# Altium PCB pico_host_board_v01_top.PcbDoc
Units mil, origin at the board's own origin, x right, y up, seen from the top; angles counter-clockwise.
Board outline 6000 x 4000 mil, 2 copper layers (Top Layer, Bottom Layer); 71 components, 75 nets, 449 pads, 3 vias.
Unrouted connection lines stored in the file: 320.
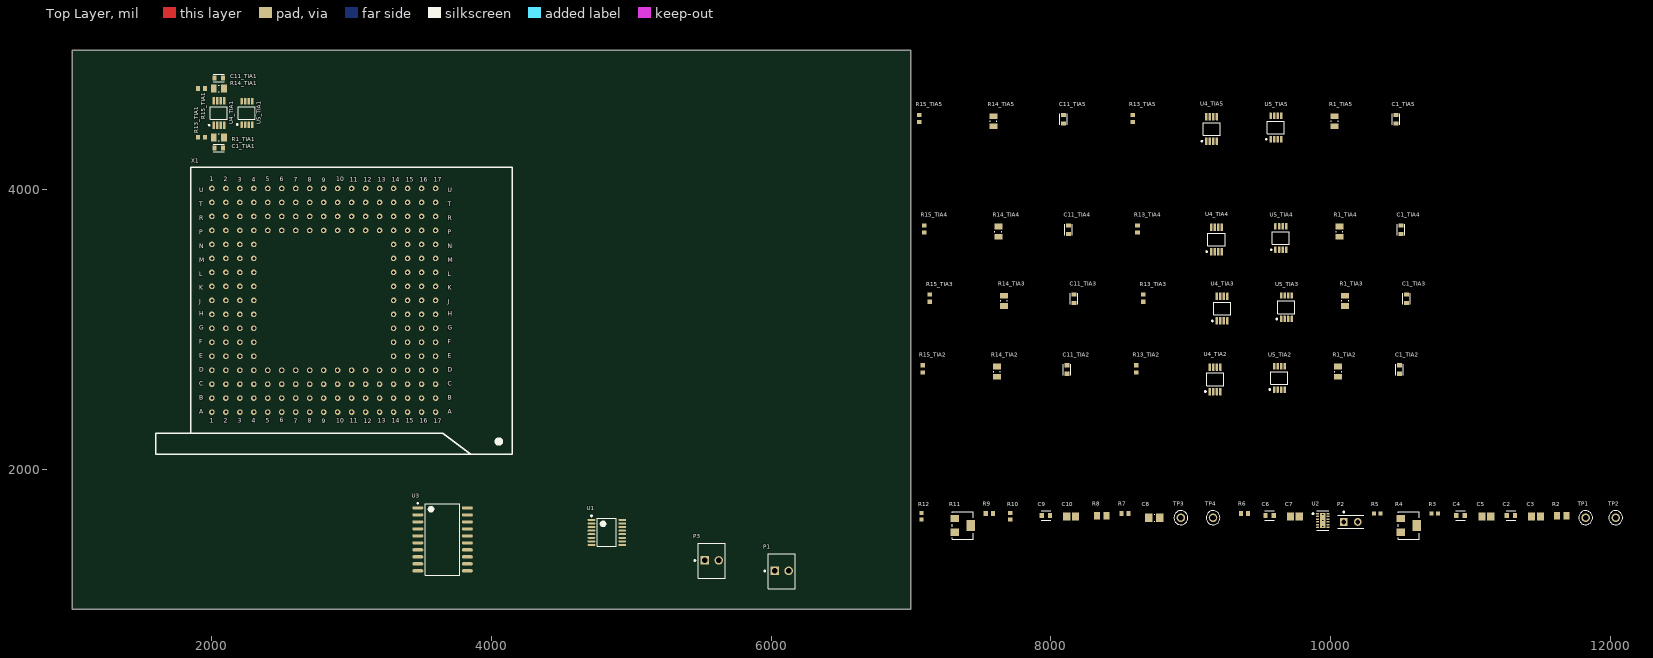
[diagram p0: Top Layer view]
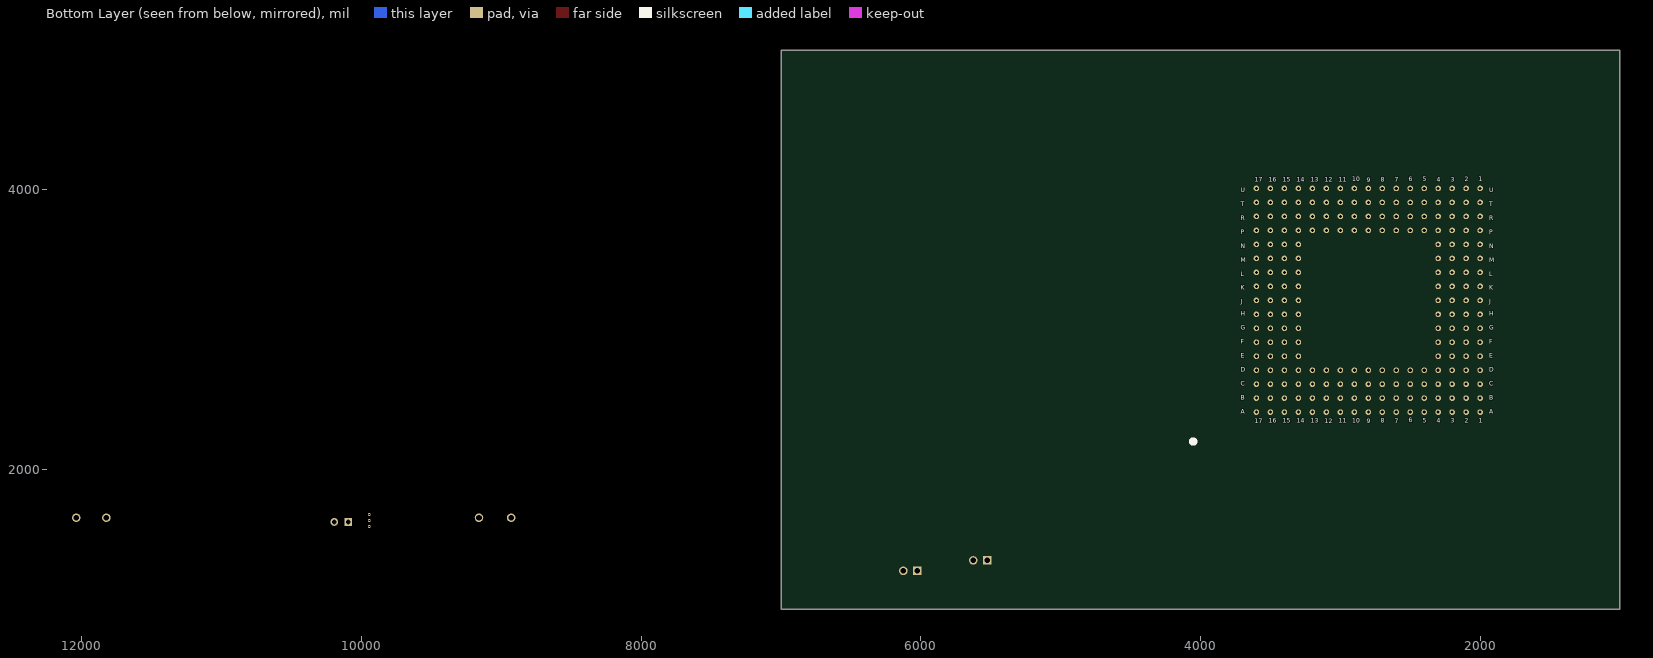
[diagram p1: Bottom Layer view, seen from below]

## Layer stack, top to bottom
Top Solder: solder mask 0.4, Solder Resist, Dk 3.5
Top Layer: signal copper 1.4
Dielectric 1: dielectric 12.6, FR-4, Dk 4.8
Bottom Layer: signal copper 1.4
Bottom Solder: solder mask 0.4, Solder Resist, Dk 3.5

## Board outline
1000,1000 7000,1000 7000,5000 1000,5000

## Design rules (kind name [scope] priority, off if disabled: settings)
Clearance [All] p1: gap=10 ignorepadtopadclearanceinfootprint=FALSE except(0: Arc-Hole Track-Hole SMDPad-Hole THPad-Hole Via-Hole Fill-Hole Poly-Hole Region-Hole Text-Hole)
PolygonConnect [All] p1: connectstyle=Relief reliefconductorwidth=10 reliefentries=4 polygonreliefangle="90 Angle" airgapwidth=10
RoomDefinition TIA5 [InComponentClass('TIA5')] p1: confinementstyle=ConfineIn formatcopy=TRUE lockcomponents=FALSE outline 7030,4305.59 10845,4305.59 10845,4675.59 7030,4675.59
RoomDefinition TIA4 [InComponentClass('TIA4')] p2: confinementstyle=ConfineIn formatcopy=TRUE lockcomponents=FALSE outline 7065,3515.59 10880,3515.59 10880,3885.59 7065,3885.59
RoomDefinition TIA3 [InComponentClass('TIA3')] p3: confinementstyle=ConfineIn formatcopy=TRUE lockcomponents=FALSE outline 7105,3020.59 10920,3020.59 10920,3390.59 7105,3390.59
RoomDefinition TIA2 [InComponentClass('TIA2')] p4: confinementstyle=ConfineIn formatcopy=TRUE lockcomponents=FALSE outline 7055,2515 10870,2515 10870,2885 7055,2885
RoomDefinition TIA1 [InComponentClass('TIA1')] p5: confinementstyle=ConfineIn formatcopy=TRUE lockcomponents=FALSE outline 1850.59,4250 2375.59,4250 2375.59,4880 1850.59,4880
RoomDefinition subckt_analog_supplies_1 [InComponentClass('subckt_analog_supplies_1')] p6: confinementstyle=ConfineIn formatcopy=TRUE lockcomponents=FALSE outline 7045,1485 12175,1485 12175,1815 7045,1815
RoutingVias [All] p1: holewidth=28 width=50 viastyle="Through Hole" minholewidth=28 minwidth=50 maxholewidth=28 maxwidth=50
SolderMaskExpansion [All] p1: expansion=4 istentingtop=FALSE
Width [All] p1: maxlimit=10 minlimit=10 preferedwidth=10
30 further rules are at their usual default settings.

## Classes and differential pairs
channel class subckt_buffered_tia_dual: TIA1 TIA2 TIA3 TIA4 TIA5
component class TIA5: C1_TIA5 C11_TIA5 R1_TIA5 R13_TIA5 R14_TIA5 R15_TIA5 U4_TIA5 U5_TIA5
component class TIA4: C1_TIA4 C11_TIA4 R1_TIA4 R13_TIA4 R14_TIA4 R15_TIA4 U4_TIA4 U5_TIA4
component class TIA3: C1_TIA3 C11_TIA3 R1_TIA3 R13_TIA3 R14_TIA3 R15_TIA3 U4_TIA3 U5_TIA3
component class TIA2: C1_TIA2 C11_TIA2 R1_TIA2 R13_TIA2 R14_TIA2 R15_TIA2 U4_TIA2 U5_TIA2
component class TIA1: C1_TIA1 C11_TIA1 R1_TIA1 R13_TIA1 R14_TIA1 R15_TIA1 U4_TIA1 U5_TIA1
component class subckt_analog_supplies_1: C2 C3 C4 C5 C6 C7 C8 C9 C10 P2 R2 R3 R4 R5 R6 R7 R8 R9 R10 R11 R12 TP1 TP2 TP3 TP4 U2
component class pico_host_board_top: J1 J2 J3 P1 P3 U1 U3
component class pico_pga_socket_1: X1

## Components (designator, comment, footprint, x,y, rotation, side; value= is the part's Value field where it differs from the comment)
C1_TIA1 "GQM1875C2ER10BB12D" FP-GQM187-0_15-MFG 2050.59,4300 r180 top (schematic designator C1)
C1_TIA2 "GQM1875C2ER10BB12D" FP-GQM187-0_15-MFG 10495,2715 r90 top (schematic designator C1)
C1_TIA3 "GQM1875C2ER10BB12D" FP-GQM187-0_15-MFG 10545,3220.59 r90 top (schematic designator C1)
C1_TIA4 "GQM1875C2ER10BB12D" FP-GQM187-0_15-MFG 10505,3715.59 r90 top (schematic designator C1)
C1_TIA5 "GQM1875C2ER10BB12D" FP-GQM187-0_15-MFG 10470,4505.59 r90 top (schematic designator C1)
C2 "CAP CER 100nF 0603 X7R" FP-CC0603-DA-MFG 11290,1670 r0 top value="100 nF"
C3 "CAP CER 4.7uF 0805 X7R" CAPC2013X140X50NL20T25 11470,1665 r0 top
C4 "CAP CER 100nF 0603 X7R" FP-CC0603-DA-MFG 10930,1670 r0 top value="100 nF"
C5 "CAP CER 4.7uF 0805 X7R" CAPC2013X140X50NL20T25 11115,1665 r0 top
C6 "CAP CER 100nF 0603 X7R" FP-CC0603-DA-MFG 9565,1670 r0 top value="100 nF"
C7 "CAP CER 4.7uF 0805 X7R" CAPC2013X140X50NL20T25 9745,1665 r0 top
C8 "CAP 470nF 10V 0805(2012)" CAPC0805(2012)145_M 8740,1655 r0 top value=470nF
C9 "CAP CER 100nF 0603 X7R" FP-CC0603-DA-MFG 7965,1670 r0 top value="100 nF"
C10 "CAP CER 4.7uF 0805 X7R" CAPC2013X140X50NL20T25 8145,1665 r0 top
C11_TIA1 "GQM1875C2ER10BB12D" FP-GQM187-0_15-MFG 2050.59,4800 r180 top (schematic designator C11)
C11_TIA2 "GQM1875C2ER10BB12D" FP-GQM187-0_15-MFG 8115,2715 r90 top (schematic designator C11)
C11_TIA3 "GQM1875C2ER10BB12D" FP-GQM187-0_15-MFG 8165,3220.59 r90 top (schematic designator C11)
C11_TIA4 "GQM1875C2ER10BB12D" FP-GQM187-0_15-MFG 8125,3715.59 r90 top (schematic designator C11)
C11_TIA5 "GQM1875C2ER10BB12D" FP-GQM187-0_15-MFG 8090,4505.59 r90 top (schematic designator C11)
P1 "22-23-2021" MOLX-22-23-2021_V 6075,1275 r0 top
P2 "5-146280-2" TECO-5-146280-2_V 10145,1625 r0 top
P3 "22-23-2021" MOLX-22-23-2021_V 5575,1350 r0 top
R1_TIA1 "CRCW0805100MJPEAHR" RESC2013X50X30NL20T20 2050.59,4375 r180 top (schematic designator R1)
R1_TIA2 "CRCW0805100MJPEAHR" RESC2013X50X30NL20T20 10055,2700 r90 top (schematic designator R1)
R1_TIA3 "CRCW0805100MJPEAHR" RESC2013X50X30NL20T20 10105,3205.59 r90 top (schematic designator R1)
R1_TIA4 "CRCW0805100MJPEAHR" RESC2013X50X30NL20T20 10065,3700.59 r90 top (schematic designator R1)
R1_TIA5 "CRCW0805100MJPEAHR" RESC2013X50X30NL20T20 10030,4490.59 r90 top (schematic designator R1)
R2 "RES SMD 0R 0805" RESC2013X55X40NL15T20 11655,1670 r0 top
R3 "DNP" RESC1608X55X30LL10T20_A 10745,1685 r0 top
R4 "3224W-1-103E" FP-3224W-MFG 10560,1600 r0 top value=10kΩ
R5 "DNP" RESC1608X55X30LL10T20_A 10335,1685 r0 top
R6 "RES SMD 10K 0603" RESC1609X55X30LL15T15 9385,1685 r0 top
R7 "RES SMD 10K 0603" RESC1609X55X30LL15T15 8530,1685 r0 top
R8 "RES SMD 0R 0805" RESC2013X55X40NL15T20 8365,1670 r0 top
R9 "RES SMD 10K 0603" RESC1609X55X30LL15T15 7560,1685 r0 top
R10 "DNP" RESC1608X55X30LL10T20_A 7710,1665 r90 top
R11 "3224W-1-103E" FP-3224W-MFG 7370,1600 r0 top value=10kΩ
R12 "DNP" RESC1608X55X30LL10T20_A 7075,1665 r90 top
R13_TIA1 "RES SMD 4.7K 1% 0603" RESC1609X55X30LL15T15 1925.59,4375 r0 top (schematic designator R13)
R13_TIA2 "RES SMD 4.7K 1% 0603" RESC1609X55X30LL15T15 8610,2720 r90 top (schematic designator R13)
R13_TIA3 "RES SMD 4.7K 1% 0603" RESC1609X55X30LL15T15 8660,3225.59 r90 top (schematic designator R13)
R13_TIA4 "RES SMD 4.7K 1% 0603" RESC1609X55X30LL15T15 8620,3720.59 r90 top (schematic designator R13)
R13_TIA5 "RES SMD 4.7K 1% 0603" RESC1609X55X30LL15T15 8585,4510.59 r90 top (schematic designator R13)
R14_TIA1 "CRCW0805100MJPEAHR" RESC2013X50X30NL20T20 2050.59,4725 r180 top (schematic designator R14)
R14_TIA2 "CRCW0805100MJPEAHR" RESC2013X50X30NL20T20 7615,2700 r90 top (schematic designator R14)
R14_TIA3 "CRCW0805100MJPEAHR" RESC2013X50X30NL20T20 7665,3205.59 r90 top (schematic designator R14)
R14_TIA4 "CRCW0805100MJPEAHR" RESC2013X50X30NL20T20 7625,3700.59 r90 top (schematic designator R14)
R14_TIA5 "CRCW0805100MJPEAHR" RESC2013X50X30NL20T20 7590,4490.59 r90 top (schematic designator R14)
R15_TIA1 "RES SMD 4.7K 1% 0603" RESC1609X55X30LL15T15 1925.59,4725 r0 top (schematic designator R15)
R15_TIA2 "RES SMD 4.7K 1% 0603" RESC1609X55X30LL15T15 7085,2720 r90 top (schematic designator R15)
R15_TIA3 "RES SMD 4.7K 1% 0603" RESC1609X55X30LL15T15 7135,3225.59 r90 top (schematic designator R15)
R15_TIA4 "RES SMD 4.7K 1% 0603" RESC1609X55X30LL15T15 7095,3720.59 r90 top (schematic designator R15)
R15_TIA5 "RES SMD 4.7K 1% 0603" RESC1609X55X30LL15T15 7060,4510.59 r90 top (schematic designator R15)
TP1 "5002" KSTN-5002 11825,1655 r0 top
TP2 "5002" KSTN-5002 12040,1655 r0 top
TP3 "5002" KSTN-5002 8930,1655 r0 top
TP4 "5002" KSTN-5002 9160,1655 r0 top
U1 "DAC8555IPWG4" TI-PW16_L 4825,1550 r0 top
U2 "LM27762DSSR" FP-DSS0012B-MFG 9945,1635 r0 top
U3 "TLC2574IDW" TI-DW20_L 3650,1500 r0 top
U4_TIA1 "OPA2380AIDGKR" DGK0008A_N 2050.59,4550 r90 top (schematic designator U4)
U4_TIA2 "OPA2380AIDGKR" DGK0008A_N 9175,2645 r90 top (schematic designator U4)
U4_TIA3 "OPA2380AIDGKR" DGK0008A_N 9225,3150.59 r90 top (schematic designator U4)
U4_TIA4 "OPA2380AIDGKR" DGK0008A_N 9185,3645.59 r90 top (schematic designator U4)
U4_TIA5 "OPA2380AIDGKR" DGK0008A_N 9150,4435.59 r90 top (schematic designator U4)
U5_TIA1 "LM8272MM" DGK0008A_L 2250.59,4550 r90 top (schematic designator U5)
U5_TIA2 "LM8272MM" DGK0008A_L 9635,2655 r90 top (schematic designator U5)
U5_TIA3 "LM8272MM" DGK0008A_L 9685,3160.59 r90 top (schematic designator U5)
U5_TIA4 "LM8272MM" DGK0008A_L 9645,3655.59 r90 top (schematic designator U5)
U5_TIA5 "LM8272MM" DGK0008A_L 9610,4445.59 r90 top (schematic designator U5)
X1 "pga_socket_208" pga_socket_208pin_17x17_minus_9x9 2800,3210 r0 top

## Footprints (in the part's own frame and the unit in brackets; to place one, negate y for a bottom-side part, rotate by r counter-clockwise, add the part's x,y. Pads: shape width x height; smd on the part's side, far side on the other; paste and mask are expansions set on the pad)
CAPC0805(2012)145_M [mm] "Chip Capacitor, Body 2.0x1.2mm, Height 1.45mm, IPC Low Density"
  rect 1.35x1.55 smd: 1(-1,0) 2(1,0)
  silkscreen extent -0.05,-0.67 0.05,0.67, body extent -1.1,-0.72 1.1,0.72, height 1.45
CAPC2013X140X50NL20T25 [mm] "Chip Capacitor, 2-Leads, Body 2.00x1.25mm, IPC Medium Density"
  rect 1.3x1.45 smd: 1(-0.8,0) 2(0.8,0)
  body extent -1.1,-0.72 1.1,0.72, height 1.4
DGK0008A_L [mm] "TSOP, 8-Leads, Body 3.1x3.1mm, Pitch 0.65mm, IPC High Density"
  rrect22% 1.15x0.45 smd: 1(-2.125,0.975) 2(-2.125,0.325) 3(-2.125,-0.325) 4(-2.125,-0.975) 5(2.125,-0.975) 6(2.125,-0.325) 7(2.125,0.325) 8(2.125,0.975)
  silkscreen extent -2.25,-1.55 1.15,1.87, body extent -2.45,-1.5 2.45,1.5, height 0.94
DGK0008A_N [mm] "TSOP, 8-Leads, Body 3.1x3.1mm, Pitch 0.65mm, IPC Medium Density"
  rrect22% 1.35x0.45 smd: 1(-2.225,0.975) 2(-2.225,0.325) 3(-2.225,-0.325) 4(-2.225,-0.975) 5(2.225,-0.975) 6(2.225,-0.325) 7(2.225,0.325) 8(2.225,0.975)
  silkscreen extent -2.35,-1.55 1.15,1.9, body extent -2.45,-1.5 2.45,1.5, height 0.94
FP-3224W-MFG [mm]
  rect 1.6x1.3 smd paste+0 mask+0: 1(-1.45,1.25) 3(-1.45,-1.25)
  rect 1.6x2 smd paste+0 mask+0: 2(1.45,0)
  silkscreen extent -1.88,-2.52 1.88,2.52, body extent -2.35,-2.63 2.35,2.63, height 0.25
FP-CC0603-DA-MFG [mm]
  rect 0.8x0.9 smd paste+0 mask+0: 1(-0.75,0) 2(0.75,0)
  silkscreen extent -0.85,-0.85 0.85,0.85, body extent -1.35,-0.75 1.35,0.75, height 0.25
FP-DSS0012B-MFG [mm]
  rrect40% 0.5x0.25 smd paste+0 mask+0: 1(-0.95,1.25) 2(-0.95,0.75) 3(-0.95,0.25) 4(-0.95,-0.25) 5(-0.95,-0.75) 6(-0.95,-1.25) 7(0.95,-1.25) 8(0.95,-0.75) 9(0.95,-0.25) 10(0.95,0.25) 11(0.95,0.75) 12(0.95,1.25)
  rrect10% 1x2.65 smd paste-1000 mask+0: 13(0,0)
  silkscreen extent -1.9,-1.8 1.05,1.8, body extent -1.3,-1.65 1.3,1.65, height 0.25
FP-GQM187-0_15-MFG [mm]
  rect 0.75x0.9 smd paste+0 mask+0: 1(-0.775,0) 2(0.775,0)
  silkscreen extent -1,-0.67 1,0.67, body extent -1.25,-0.58 1.25,0.58, height 0.25
KSTN-5002 [mm] "Test Point, Through Hole, Dia 2.54mm"
  round 1.55 hole 1.016: 1(0,0)
  silkscreen extent -1.27,-1.27 1.27,1.27, body extent -1.25,-1.25 1.25,1.25, height 4.62
MOLX-22-23-2021_V [mm] "THD, 2-Leads, Body 6.35x4.93mm, Pitch 2.54mm"
  rect 1.55x1.55 hole 1.02: 1(-1.27,0)
  round 1.55 hole 1.02: 2(1.27,0)
  silkscreen extent -3.19,-3.25 2.46,3.1, body extent -2.46,-3.25 2.46,3.1, height 10.66
pga_socket_208pin_17x17_minus_9x9 [mil]
  round 40 hole 22: A1(-800,-800) A2(-700,-800) A3(-600,-800) A4(-500,-800) A5(-400,-800) A6(-300,-800) A7(-200,-800) A8(-100,-800) A9(0,-800) A10(100,-800) A11(200,-800) A12(300,-800) A13(400,-800) A14(500,-800) A15(600,-800) A16(700,-800) A17(800,-800) B1(-800,-700) B2(-700,-700) B3(-600,-700) B4(-500,-700) B5(-400,-700) B6(-300,-700) B7(-200,-700) B8(-100,-700) B9(0,-700) B10(100,-700) B11(200,-700) B12(300,-700) B13(400,-700) B14(500,-700) B15(600,-700) B16(700,-700) B17(800,-700) C1(-800,-600) C2(-700,-600) C3(-600,-600) C4(-500,-600) C5(-400,-600) C6(-300,-600) C7(-200,-600) C8(-100,-600) C9(0,-600) C10(100,-600) C11(200,-600) C12(300,-600) C13(400,-600) C14(500,-600) C15(600,-600) C16(700,-600) C17(800,-600) D1(-800,-500) D2(-700,-500) D3(-600,-500) D4(-500,-500) D5(-400,-500) D6(-300,-500) D7(-200,-500) D8(-100,-500) D9(0,-500) D10(100,-500) D11(200,-500) D12(300,-500) D13(400,-500) D14(500,-500) D15(600,-500) D16(700,-500) D17(800,-500) E1(-800,-400) E2(-700,-400) E3(-600,-400) E4(-500,-400) E14(500,-400) E15(600,-400) E16(700,-400) E17(800,-400) F1(-800,-300) F2(-700,-300) F3(-600,-300) F4(-500,-300) F14(500,-300) F15(600,-300) F16(700,-300) F17(800,-300) G1(-800,-200) G2(-700,-200) G3(-600,-200) G4(-500,-200) G14(500,-200) G15(600,-200) G16(700,-200) G17(800,-200) H1(-800,-100) H2(-700,-100) H3(-600,-100) H4(-500,-100) H14(500,-100) H15(600,-100) H16(700,-100) H17(800,-100) J1(-800,0) J2(-700,0) J3(-600,0) J4(-500,0) J14(500,0) J15(600,0) J16(700,0) J17(800,0) K1(-800,100) K2(-700,100) K3(-600,100) K4(-500,100) K14(500,100) K15(600,100) K16(700,100) K17(800,100) L1(-800,200) L2(-700,200) L3(-600,200) L4(-500,200) L14(500,200) L15(600,200) L16(700,200) L17(800,200) M1(-800,300) M2(-700,300) M3(-600,300) M4(-500,300) M14(500,300) M15(600,300) M16(700,300) M17(800,300) N1(-800,400) N2(-700,400) N3(-600,400) N4(-500,400) N14(500,400) N15(600,400) N16(700,400) N17(800,400) P1(-800,500) P2(-700,500) P3(-600,500) P4(-500,500) P5(-400,500) P6(-300,500) P7(-200,500) P8(-100,500) P9(0,500) P10(100,500) P11(200,500) P12(300,500) P13(400,500) P14(500,500) P15(600,500) P16(700,500) P17(800,500) R1(-800,600) R2(-700,600) R3(-600,600) R4(-500,600) R5(-400,600) R6(-300,600) R7(-200,600) R8(-100,600) R9(0,600) R10(100,600) R11(200,600) R12(300,600) R13(400,600) R14(500,600) R15(600,600) R16(700,600) R17(800,600) T1(-800,700) T2(-700,700) T3(-600,700) T4(-500,700) T5(-400,700) T6(-300,700) T7(-200,700) T8(-100,700) T9(0,700) T10(100,700) T11(200,700) T12(300,700) T13(400,700) T14(500,700) T15(600,700) T16(700,700) T17(800,700) U1(-800,800) U2(-700,800) U3(-600,800) U4(-500,800) U5(-400,800) U6(-300,800) U7(-200,800) U8(-100,800) U9(0,800) U10(100,800) U11(200,800) U12(300,800) U13(400,800) U14(500,800) U15(600,800) U16(700,800) U17(800,800)
  silkscreen extent -1200,-1100 1350,950
RESC1608X55X30LL10T20_A [mm] "Chip Resistor, 2-Leads, Body 1.7x0.9mm, IPC High Density"
  rect 0.7x0.8 smd: 1(-0.6,0) 2(0.6,0)
  body extent -0.85,-0.45 0.85,0.45, height 0.55
RESC1609X55X30LL15T15 [mm] "Chip Resistor, 2-Leads, Body 1.75x0.95mm, IPC High Density"
  rect 0.75x0.85 smd: 1(-0.65,0) 2(0.65,0)
  body extent -0.87,-0.48 0.87,0.48, height 0.55
RESC2013X50X30NL20T20 [mm] "Chip Resistor, 2-Leads, Body 2.00x1.25mm, IPC Medium Density"
  rect 1.05x1.45 smd: 1(-0.925,0) 2(0.925,0)
  silkscreen extent -0.1,-0.63 0.1,0.63, body extent -1.1,-0.72 1.1,0.72, height 0.5
RESC2013X55X40NL15T20 [mm] "Chip Resistor, 2-Leads, Body 2.00x1.25mm, IPC Medium Density"
  rect 1.1x1.4 smd: 1(-0.875,0) 2(0.875,0)
  body extent -1.07,-0.7 1.08,0.7, height 0.55
TECO-5-146280-2_V [mm] "Connector, 2-Leads, Body 4.67x2.34mm, Pitch 2.54mm"
  rect 1.4x1.4 hole 0.89: 1(-1.27,0)
  round 1.4 hole 0.89: 2(1.27,0)
  silkscreen extent -2.33,-1.17 2.33,1.94, body extent -2.34,-1.17 2.34,1.17, height 5.33
TI-DW20_L [mm] "SOIC, 20-Leads, Body 12.8x7.5mm, Pitch 1.27mm, IPC High Density"
  oval 2x0.6 smd: 1(-4.5,5.715) 2(-4.5,4.445) 3(-4.5,3.175) 4(-4.5,1.905) 5(-4.5,0.635) 6(-4.5,-0.635) 7(-4.5,-1.905) 8(-4.5,-3.175) 9(-4.5,-4.445) 10(-4.5,-5.715) 11(4.5,-5.715) 12(4.5,-4.445) 13(4.5,-3.175) 14(4.5,-1.905) 15(4.5,-0.635) 16(4.5,0.635) 17(4.5,1.905) 18(4.5,3.175) 19(4.5,4.445) 20(4.5,5.715)
  silkscreen extent -4.62,-6.5 3.1,6.69, body extent -3.8,-6.5 3.8,6.5, height 2.65
TI-PW16_L [mm] "SOP, 16-Leads, Body 5x4.4mm, Pitch 0.65mm, IPC High Density"
  oval 1.4x0.35 smd: 1(-2.8,2.275) 2(-2.8,1.625) 3(-2.8,0.975) 4(-2.8,0.325) 5(-2.8,-0.325) 6(-2.8,-0.975) 7(-2.8,-1.625) 8(-2.8,-2.275) 9(2.8,-2.275) 10(2.8,-1.625) 11(2.8,-0.975) 12(2.8,-0.325) 13(2.8,0.325) 14(2.8,0.975) 15(2.8,1.625) 16(2.8,2.275)
  silkscreen extent -2.92,-2.55 1.7,3.12, body extent -2.25,-2.55 2.25,2.55, height 1.2

## Part data
C1_TIA1 C1_TIA2 C1_TIA3 C1_TIA4 C1_TIA5 C11_TIA1 C11_TIA2 C11_TIA3 C11_TIA4 C11_TIA5: library part CMP-06035-052255-1, "Ceramic Capacitor 0.1pF ±0.1pF 250VDC C0G 0603 Paper T/R", Capacitance=0.1pF, Case Code (Imperial)=0603, Case Code (Metric)=1608, Dielectric=C0G, Max Operating Temperature=125°C, Min Operating Temperature=-55°C, Package Quantity=4000, Voltage Rating=250V, Case/Package=0603, Depth=0.8mm, Height=0.7mm, Length=1.6mm, Mount="Surface Mount", Packaging="Tape and Reel", Radiation Hardening=No, Termination=SMD/SMT, Thickness=0.031inch, Voltage Rating (DC)=250V, Width=0.031inch
C2 C4 C6 C9: library part CMP-03422-000030-1, "CAP CER 0.1UF 16V X7R 0603", Capacitance="100 nF", Manufacturer=YAGEO, Manufacturer Part Number=CC0603KRX7R7BB104, Package=CC0603-DA, Temperature="-55°C to +125°C", Temperature Characteristic=X7R, Temperature Coefficient=15%, Temperature Range High=+125°C, Temperature Range Low=-55°C, Tolerance=0.1, Voltage="16 V", Automotive=No, Category=Cap, ComponentLink2Description=Datasheet, ComponentLink2URL=http://www.yageo.com/documents/recent/UPY-GPHC_X7R_6.3V-to-50V_18.pdf, Device Class L1="Passive Components", Device Class L2=Capacitors, Device Class L3="Ceramic Capacitors", Digikey Description="CAP CER 0.1UF 16V X7R 0603", Footprint Url=http://www.yageo.com/exep/pages/download/literatures/UPY-C_GEN_24.pdf, Height=0.9mm, Lead Free=Yes, Material=Ceramic, Mouser Description="Multilayer Ceramic Capacitor, CC Series, 0.1 - F, - 10%, X7R, 16 V, 0603 [1608 Metric]", Octopart=https://octopart.com/cc0603krx7r7bb104-yageo-192941, RoHS=TRUE, Voltage Rating="16 V"
C3 C5 C7 C10: library part CMP-2007-04677-1, Manufacturer="AVX Interconnect / Elco", Part Number=0805ZC475KAT2A
C8: library part CMP-1036-04629-1, "CAP 470nF 10V ±5% 0805 (2012 Metric) Thickness 1.45mm SMD", Case-EIA=0805, Case-Metric=2012, Rated Voltage="10 V", Tolerance=Â±5%, Max Thickness="1.45 mm", Technology=SMT
P1 P3: library part CMP-1704-00001-3, "Male Header, Pitch 2.54 mm, 1 x 2 Position, Height 10.67 mm, Tail Length 3.56 mm, 0 to 75 degC, RoHS, Bulk", Max Operating Temperature="75 degC", Min Operating Temperature="0 degC", Package Quantity=3000, ComponentLink1Description="Manufacturer URL", ComponentLink1URL=http://www.molex.com/, ComponentLink2Description=Datasheet, ComponentLink2URL=https://datasheet.ciiva.com/19454/232266-19454304.pdf, Height="10.67 mm", Length="5.08 mm", Mount="Through Hole", Mounting Technology="Through Hole", PackageDescription="Male Header, Pitch 2.54 mm, 1 x 2 Position, Height 10.67 mm, Tail Length 3.56 mm", Packaging=Bulk, PartNumber=22-23-2021, Pins=2, Radiation Hardening=No, REACH SVHC=Unknown, RoHSCompliant=True, Width="6.35 mm"
P2: library part CMP-2000-07492-1, "Male Header, Pitch 2.54 mm, 1 x 2 Position, Height 8.21 mm, Tail Length 3.05 mm, -65 to 105 degC, RoHS, Bulk", Case\/Package=100, Colour=Black, Current Rating=3A, Flammability Rating=UL94V-0, High Temperature Housing=Yes, Manufacturer="TE Connectivity", Max Current Rating=5A, Max Operating Temperature=105degC, Min Operating Temperature=-65degC, Package Description="Male Header, Pitch 2.54 mm, 1 x 2 Position, Height 8.21 mm, Tail Length 3.05 mm", Package Quantity=500, Approvals=CSA, Board Standoff=No(Without), Connector Type=Header, Contact Gender=Male, Contact Material=CopperAlloy, Contact Mating Length=0.23inch, Contact Plating=Matte, Contact Protection=No(Without), Contact Shape=Square, Datasheet URL=http://www.te.com/commerce/DocumentDelivery/DDEController?Action=showdoc&DocId=Customer+Drawing%7F146280%7FH1%7Fpdf%7FEnglish%7FENG_CD_146280_H1.pdf%7F5-146280-2, Datasheet Version="Rev. H1, 08/2016", Depth=2.34mm, Gasket=No(Without), High Speed Serial Data Connector=No, Housing Colour=Black, Housing Material=Polymer, Keyed=No, Length=4.67mm, Manufacturer URL=http://www.te.com/, Mating Alignment=No(Without), Mating Connector Lock=No(Without), Mating Post Length=0.23inch, Mount=ThroughHole, Mounting Technology=ThroughHole, Number of Contacts=2, Number of Positions=2, Number of Rows=1, Orientation=Straight, Package Reference=5-146280-2, Packaging=Carton, Panel Mount Retention=No(Without), PCB Mount Retention=Without, PCB Mounting Orientation=Vertical, PCB Thickness=0.063inch, Pitch=2.54mm, Radiation Hardening=No, RoHSCompliant=true, Row Spacing=2.54mm, Selectively Loaded=No(Without), Stabilizers=No(Without), Termination=ThroughHole, Termination Post Length=0.12inch
R1_TIA1 R1_TIA2 R1_TIA3 R1_TIA4 R1_TIA5 R14_TIA1 R14_TIA2 R14_TIA3 R14_TIA4 R14_TIA5: library part CMP-2001-04281-1, Manufacturer="Vishay Dale", Part Number=CRCW0805100MJPEAHR
R2 R8: library part CMP-2001-04723-1, Manufacturer="Vishay Dale", Part Number=TNPW0805100RBEEA
R3 R5 R10 R12: library part CMP-2000-06686-1, "Chip Resistor, 0 Ohm, +/- 5%, 100 mW, -55 to 155 degC, 0603 (1608 Metric), RoHS, Tape and Reel", Manufacturer=Rohm, Operating Temperature=-55°C~155°C, Package / Case=0603(1608Metric), Package Description="2-Pin Surface Mount Device, Body 1.60 x 0.80 mm", Package Reference=0603, Power (Watts)=0.1W,1/10W, Resistance (Ohms)=0.0, Standard Package=5,000, Temperature Coefficient=-, Tolerance=Jumper, Category=Resistors, Composition=ThickFilm, Datasheet URL=http://www.rohm.com/web/global/datasheet/MCR03ERTJ, Datasheet Version="Rev. F, 02/2015", EDA / CAD Models=DownloadfromAcceleratedDesigns, Family=ChipResistor-SurfaceMount, Features=-, Height="0.022\"(0.55mm)", Manufacturer URL=http://www.rohm.com/web/global/, Mounting Technology=SurfaceMount, Number of Terminations=2, Online Catalog=MCR03Series, Other Names=RHM0.0CGTR, Packaging=Tape&Reel(TR), Series=MCR, Size / Dimension="0.063\"Lx0.031\"W(1.60mmx0.80mm)", Supplier Device Package=0603(1608Metric)
R4 R11: library part CMP-07234-000002-1, "TRIMMER 10K OHM 0.25W J LEAD TOP", Manufacturer=Bourns, Package=3224W, Power Rating=250mW, Resistance=10kΩ, Temperature="-65°C to +150°C", Temperature Coefficient=100ppm/°C, Temperature Range High=+150°C, Temperature Range Low=-65°C, Tolerance=10%, Voltage Rating=300V, Automotive=No, Category=Res, ComponentLink2Description=Datasheet, ComponentLink2URL=https://upverter.com/datasheet/a166fca85da25564670351d2dc712345c058bc40.pdf, Composition=Cermet, Device Class L1="Passive Components", Device Class L2=Resistors, Device Class L3="Variable Resistors and Potentiometers", Digikey Description="TRIMMER 10K OHM 0.25W J LEAD TOP", Height=5.55mm, Lead Free=Yes, Manufacturer Part Number=3224W-1-103E, Mouser Description="Trimmer Resistors - SMD 4mm 10Kohms 10% Square Cermet Sealed", Octopart=https://octopart.com/3224w-1-103e-bourns-14818, RoHS=TRUE, Series=3224, Standoff Height=0.2mm
R6 R7 R9 R13_TIA1 R13_TIA2 R13_TIA3 R13_TIA4 R13_TIA5 R15_TIA1 R15_TIA2 R15_TIA3 R15_TIA4 R15_TIA5: library part CMP-2000-07452-1, "Chip Resistor, 10 KOhm, +/- 1%, 0.1 W, -55 to 155 degC, 0603 (1608 Metric), RoHS, Tape and Reel", Case Code (Imperial)=0603, Case Code (Metric)=1608, Manufacturer=Panasonic, Max Operating Temperature=155degC, Max Power Dissipation=100mW, Min Operating Temperature=-55degC, Package Description="2-Pin Surface Mount Device, Body 1.6 x 0.85 mm", Package Quantity=1, Package Reference=603, Resistance=10KOhm, Temperature Coefficient=100ppm\/degreesC, Tolerance=1%, Voltage Rating=75V, Case\/Package=0603, Composition=ThickFilm, Contact Plating=Tin, Datasheet URL=https://industrial.panasonic.com/cdbs/www-data/pdf/RDA0000/AOA0000C304.pdf, Datasheet Version=02/2017, Depth=0.8mm, Height=0.45mm, Lead Free=LeadFree, Length=1.6mm, Manufacturer URL=http://www.panasonic.com/, Military Standard=Not, Mount=SurfaceMount, Mounting Technology=SurfaceMount, Number of Pins=2, Number of Terminations=2, Packaging=TapeandReel, Power Rating=100mW, Radiation Hardening=No, REACH SVHC=NoSVHC, RoHSCompliant=true, Termination=SMD/SMT, Voltage Rating (DC)=75V, Width=0.031inch
TP1 TP2 TP3 TP4: library part CMP-2000-05182-1, "Test Point, White, 1-Pin THD, RoHS, Bulk", Color=White, Manufacturer=KeystoneElectronics, Brand=KeystoneElectronics, Contact Material=PhosphorBronze, Datasheet URL=https://ciiva.com/datasheet-click-2917627?src=ciiva&sig=bd195616, Datasheet Version="Rev. G, 12/2008", Length=7.62mm, Manufacturer URL=http://www.keyelco.com/, Material=Nylon, Mounting Hole Size=1mm, Outside Diameter=2.54mm, Packaging=Bulk, Plating=Silver, Product=TestPoints, Product Category=CircuitBoardHardware-PCB, RoHS=True, Type=Miniature
U1: library part CMP-0004-01174-1, "16-Bit, Quad Channel, Ultralow Glitch, Voltage Output Digital to Analog Converter, -40 to 105 degC, 16-pin SOP (PW16), Green (RoHS & no Sb/Br)", Manufacturer="Texas Instruments", Code_JEDEC=MO-153, ComponentLink1Description="Manufacturer URL", ComponentLink1URL=http://www.ti.com/, ComponentLink2Description=Datasheet, ComponentLink2URL=http://www.ti.com/general/docs/lit/getliterature.tsp?genericPartNumber=DAC8555&fileType=pdf, ComponentLink3Description="Package Specification", ComponentLink3URL=http://www.ti.com/lit/ml/mpds361/mpds361.pdf, DAC Channels=4, DatasheetVersion=SLAS475B, DNL(Max)(+/-LSB)=1, Eco-Plan="Green (RoHS & no Sb/Br)", Interface="Serial SPI", Mounting Technology="Surface Mount", PackageDescription="16-Pin Plastic Small Outline, Body 5 x 4.4 mm, Pitch 0.65 mm", PackageReference=PW16, PackageVersion="4040064-4/G, 02/2011", PartNumber=DAC8555IPWG4, Resolution(Bits)=16, Settling Time(us)=10, SFDR(dB)=87, SNR(dB)=95, SubFamily="Precision DAC (=<10MSPS)"
U2: library part CMP-04918-000139-1, "IC REG CHARGE PUMP ADJ DL 12WSON", Max Input Voltage=5.5V, Max Operating Temperature=85°C, Max Output Voltage=5V, Min Input Voltage=2.7V, Min Operating Temperature=-40°C, Min Output Voltage=1.5V, Output Current=250mA, Quiescent Current=390uA, Switching Frequency=2.3MHz, Lead Free="Lead Free", Mount="Surface Mount", Output Type=Adjustable, Packaging="Tape and Reel", Synchronous Rectifier=No, Topology="Charge Pump"
U3: library part CMP-0003-01500-1, "Serial Out, Low Power with Built-In Conversion Clock and 8 x FIFO, 4 Channel, -40 to 85 degC, 20-pin SOIC (DW20), Green (RoHS & no Sb/Br)", Analog Voltage AV/DD(Max)(V)=5.5, Analog Voltage AV/DD(Min)(V)=4.75, Manufacturer="Texas Instruments", # Input Channels=4, Architecture=SAR, Code_JEDEC=MO-013, ComponentLink1Description="Manufacturer URL", ComponentLink1URL=http://www.ti.com/, ComponentLink2Description=Datasheet, ComponentLink2URL=http://www.ti.com/general/docs/lit/getliterature.tsp?genericPartNumber=TLC2574&fileType=pdf, ComponentLink3Description="Package Specification", ComponentLink3URL=http://www.ti.com/lit/ml/mpds173a/mpds173a.pdf, DatasheetVersion=SLAS262C, Digital Supply(Max)(V)=5.5, Digital Supply(Min)(V)=2.7, Eco-Plan="Green (RoHS & no Sb/Br)", ENOB(Bits)=11.7, INL(Max)(+/-LSB)=1, Interface="Serial SPI", Mounting Technology="Surface Mount", PackageDescription="20-Pin Plastic Small Outline, Body 12.8 x 7.5 mm, Pitch 1.27 mm", PackageReference=DW20, PackageVersion="4040000-4/G, 01/2011", PartNumber=TLC2574IDW, Resolution(Bits)=12, Sample Rate (max)(SPS)=200K, SFDR(dB)=83, SINAD(dB)=72, SNR(dB)=72, SubFamily="Precision ADC (<=10MSPS)"
U4_TIA1 U4_TIA2 U4_TIA3 U4_TIA4 U4_TIA5: library part CMP-0018-00593-2, "High Speed Precision Transimpedance Amplifier, 2.7 to 5.5 V, -40 to 125 degC, 8-pin SOP (DGK8), Green (RoHS & no Sb/Br)", Manufacturer="Texas Instruments", Code_JEDEC=MO-187, ComponentLink1Description="Manufacturer URL", ComponentLink1URL=http://www.ti.com/, ComponentLink2Description=Datasheet, ComponentLink2URL=http://www.ti.com/general/docs/lit/getliterature.tsp?genericPartNumber=OPA2380&fileType=pdf, ComponentLink3Description="Package Specification", ComponentLink3URL=http://www.ti.com/litv/pdf/mpds028d, DatasheetVersion=SBOS291G, Eco-Plan="Green (RoHS & no Sb/Br)", Iib(Max)(nA)=0.05, Iq per channel(Max)(mA)=8.8, Mounting Technology="Surface Mount", Number of Channels=2, PackageDescription="8-Pin Thin Small Outline, Body 3 x 3 mm, Pitch 0.65 mm", PackageReference=DGK0008A, PackageVersion="4073329/E, 05/2006", PartNumber=OPA2380AIDGKR, Slew Rate(Typ)(V/us)=80, Sub Family="High Speed Amplifier (>=50MHz), Low Offset Voltage Amplifier (<=500uV), Low Supply Voltage Amplifier (<=2.7V)", Vio(Max)(mV)=0.025, Vn at Flatband(Typ)(nV/rtHz)=3, Vs(Max)(V)=5.5, Vs(Min)(V)=2.7
U5_TIA1 U5_TIA2 U5_TIA3 U5_TIA4 U5_TIA5: library part CMP-0055-01394-3, "RRIO, High Output Current & Unlimited Cap Load Op Amp, 8-pin Mini SOIC", Manufacturer="Texas Instruments", Package Reference=DGK0008A, PackageTopMarking=ZXTT*A60, PowerWise=N, Code_JEDEC=MO-187-AA, ComponentLink1Description="Datasheet URL", ComponentLink1URL=http://www.ti.com/general/docs/lit/getliterature.tsp?genericPartNumber=LM8272&fileType=pdf, CompType=Amplifiers, PackageDescription="MINI SOIC, .118 x .118 x .034in, 8 Lead, .0256in Pitch", PinCount=8, RoHS=N

## Via types
v1: diameter 19.68, hole 7.87, Top Layer to Bottom Layer, 3 vias

## Nets (pads, with @x,y where several pads share a name; then routed paths per layer and width w, separated by ;. In a path a pad name is that pad's centre, name@x,y a point inside that pad or via, vN(x,y) a via of type N, cw(c..) or ccw(c..) an arc to the next point about the centre after c; other vN are vias at no path point)
CP_EN_M: P2.2 R9.2 U2.8
CP_EN_P: R7.1 U2.12
CP_FB_M: R10.1 R11.2 R12.2 U2.7
CP_FB_P: R3.1 R4.2 R5.2 U2.2
CP_FLY_N: C8.2 U2.9
CP_FLY_P: C8.1 U2.10
CP_OUT_M: R8.1 TP3.1 U2.6
CP_OUT_P: R2.1 TP1.1 U2.11
CP_PGOOD: R6.1 U2.1
CP_SW_OUT: C2.1 C3.1 U2.5
GND: X1.A1 X1.A2 X1.A3 X1.A4 X1.A5 X1.A6 X1.A7 X1.A8 X1.A9 X1.A16 X1.A17 X1.B1 X1.B2 X1.B3 X1.B4 X1.B5 X1.B6 X1.B9 X1.B10 X1.B15 X1.B16 X1.B17 X1.C1 X1.C2 X1.C3 X1.C4 X1.C9 X1.C10 X1.C11 X1.C12 X1.C13 X1.C14 X1.C15 X1.C16 X1.C17 X1.D1 X1.D2 X1.D3 X1.D4 X1.D9 X1.D10 X1.D11 X1.D12 X1.D13 X1.D14 X1.D15 X1.D16 X1.D17 X1.E1 X1.E2 X1.E3 X1.E4 X1.E14 X1.E15 X1.E16 X1.E17 X1.F1 X1.F2 X1.F3 X1.F4 X1.F14 X1.F15 X1.F16 X1.F17 X1.G1 X1.G2 X1.G3 X1.G4 X1.G14 X1.G15 X1.G16 X1.G17 X1.H1 X1.H2 X1.H3 X1.H4 X1.H14 X1.H15 X1.H16 X1.H17 X1.J1 X1.J2 X1.J3 X1.J4 X1.J14 X1.J15 X1.J16 X1.J17 X1.K1 X1.K2 X1.K3 X1.K4 X1.K14 X1.K15 X1.K16 X1.K17 X1.L1 X1.L2 X1.L3 X1.L4 X1.L14 X1.L15 X1.L16 X1.L17 X1.M1 X1.M2 X1.M3 X1.M4 X1.M14 X1.M15 X1.M16 X1.M17 X1.N1 X1.N2 X1.N3 X1.N4 X1.N14 X1.N15 X1.N16 X1.N17 X1.P1 X1.P2 X1.P3 X1.P4 X1.P5 X1.P6 X1.P7 X1.P8 X1.P9 X1.P14 X1.P15 X1.P16 X1.P17 X1.R1 X1.R2 X1.R3 X1.R4 X1.R5 X1.R6 X1.R7 X1.R8 X1.R9 X1.R14 X1.R15 X1.R16 X1.R17 X1.T1 X1.T2 X1.T3 X1.T8 X1.T9 X1.T12 X1.T13 X1.T14 X1.T15 X1.T16 X1.T17 X1.U1 X1.U2 X1.U9 X1.U10 X1.U11 X1.U12 X1.U13 X1.U14 X1.U15 X1.U16 X1.U17
GND_TIA1: U4_TIA1.4
GND_TIA2: U4_TIA2.4
GND_TIA3: U4_TIA3.4
GND_TIA4: U4_TIA4.4
GND_TIA5: U4_TIA5.4
MRF1_1HA: X1.A15
MRF1_1HB: X1.B14
MRF1_1K: C1_TIA1.1 C1_TIA2.1 C1_TIA3.1 C1_TIA4.1 C1_TIA5.1 R1_TIA1.1 R1_TIA2.1 R1_TIA3.1 R1_TIA4.1 R1_TIA5.1 U4_TIA1.2 U4_TIA2.2 U4_TIA3.2 U4_TIA4.2 U4_TIA5.2 X1.R13
MRF2_1HA: X1.B13
MRF2_1HB: X1.A13
MRF2_1K: C11_TIA1.1 C11_TIA2.1 C11_TIA3.1 C11_TIA4.1 C11_TIA5.1 R14_TIA1.1 R14_TIA2.1 R14_TIA3.1 R14_TIA4.1 R14_TIA5.1 U4_TIA1.6 U4_TIA2.6 U4_TIA3.6 U4_TIA4.6 U4_TIA5.6 X1.R11
MRF2_2HA: X1.A14
MRF2_2HB: X1.B12
MRF2_2K: X1.P11
MRF3_1HA: X1.A11
MRF3_1HB: X1.A10
MRF3_1K: X1.U7
MRF3_2HA: X1.B11
MRF3_2HB: X1.B8
MRF3_2K: X1.U8
MRF3_3HA: X1.A12
MRF3_3HB: X1.C8
MRF3_3K: X1.T10
MRF4_1HA: X1.D7
MRF4_1HB: X1.C6
MRF4_1K: X1.U3
MRF4_2HA: X1.C7
MRF4_2HB: X1.D6
MRF4_2K: X1.T4
MRF4_3HA: X1.B7
MRF4_3HB: X1.C5
MRF4_3K: X1.U4
MRF4_4HA: X1.D8
MRF4_4HB: X1.D5
MRF4_4K: X1.T5
NetC6_1: C6.1 C7.1 P1.2 P2.1 R6.2 R7.2 U2.3
TIA_OUT_A_TIA1: C1_TIA1.2 R1_TIA1.2 R13_TIA1.2 U4_TIA1.1 U5_TIA1.3
TIA_OUT_A_TIA2: C1_TIA2.2 R1_TIA2.2 R13_TIA2.2 U4_TIA2.1 U5_TIA2.3
TIA_OUT_A_TIA3: C1_TIA3.2 R1_TIA3.2 R13_TIA3.2 U4_TIA3.1 U5_TIA3.3
TIA_OUT_A_TIA4: C1_TIA4.2 R1_TIA4.2 R13_TIA4.2 U4_TIA4.1 U5_TIA4.3
TIA_OUT_A_TIA5: C1_TIA5.2 R1_TIA5.2 R13_TIA5.2 U4_TIA5.1 U5_TIA5.3
TIA_OUT_B_TIA1: C11_TIA1.2 R14_TIA1.2 R15_TIA1.2 U4_TIA1.7 U5_TIA1.5
TIA_OUT_B_TIA2: C11_TIA2.2 R14_TIA2.2 R15_TIA2.2 U4_TIA2.7 U5_TIA2.5
TIA_OUT_B_TIA3: C11_TIA3.2 R14_TIA3.2 R15_TIA3.2 U4_TIA3.7 U5_TIA3.5
TIA_OUT_B_TIA4: C11_TIA4.2 R14_TIA4.2 R15_TIA4.2 U4_TIA4.7 U5_TIA4.5
TIA_OUT_B_TIA5: C11_TIA5.2 R14_TIA5.2 R15_TIA5.2 U4_TIA5.7 U5_TIA5.5
TIA_OUT_BUF_A_TIA1: U5_TIA1.1 U5_TIA1.2
TIA_OUT_BUF_A_TIA2: U5_TIA2.1 U5_TIA2.2
TIA_OUT_BUF_A_TIA3: U5_TIA3.1 U5_TIA3.2
TIA_OUT_BUF_A_TIA4: U5_TIA4.1 U5_TIA4.2
TIA_OUT_BUF_A_TIA5: U5_TIA5.1 U5_TIA5.2
TIA_OUT_BUF_B_TIA1: U5_TIA1.6 U5_TIA1.7
TIA_OUT_BUF_B_TIA2: U5_TIA2.6 U5_TIA2.7
TIA_OUT_BUF_B_TIA3: U5_TIA3.6 U5_TIA3.7
TIA_OUT_BUF_B_TIA4: U5_TIA4.6 U5_TIA4.7
TIA_OUT_BUF_B_TIA5: U5_TIA5.6 U5_TIA5.7
VBIAS_KATH_TIA1: U4_TIA1.3 U4_TIA1.5
VBIAS_KATH_TIA2: U4_TIA2.3 U4_TIA2.5
VBIAS_KATH_TIA3: U4_TIA3.3 U4_TIA3.5
VBIAS_KATH_TIA4: U4_TIA4.3 U4_TIA4.5
VBIAS_KATH_TIA5: U4_TIA5.3 U4_TIA5.5
VBIAS_PD_ANODE: X1.P10 X1.P12 X1.P13 X1.R10 X1.R12 X1.T6 X1.T7 X1.T11 X1.U5 X1.U6
VDD_ANALOG: C4.1 C5.1 R2.2 R3.2 R4.3 TP2.1 U4_TIA1.8 U4_TIA2.8 U4_TIA3.8 U4_TIA4.8 U4_TIA5.8 U5_TIA1.8 U5_TIA2.8 U5_TIA3.8 U5_TIA4.8 U5_TIA5.8
VSS_ANALOG: C9.1 C10.1 R8.2 R10.2 R11.3 R13_TIA1.1 R13_TIA2.1 R13_TIA3.1 R13_TIA4.1 R13_TIA5.1 R15_TIA1.1 R15_TIA2.1 R15_TIA3.1 R15_TIA4.1 R15_TIA5.1 TP4.1 U5_TIA1.4 U5_TIA2.4 U5_TIA3.4 U5_TIA4.4 U5_TIA5.4
pads on no net: C2.2 C3.2 C4.2 C5.2 C6.2 C7.2 C9.2 C10.2 P1.1 P3.1 P3.2 R4.1 R5.1 R9.1 R11.1 R12.1 U1.1 U1.2 U1.3 U1.4 U1.5 U1.6 U1.7 U1.8 U1.9 U1.10 U1.11 U1.12 U1.13 U1.14 U1.15 U1.16 U2.4 U2.13 U3.1 U3.2 U3.3 U3.4 U3.5 U3.6 U3.7 U3.8 U3.9 U3.10 U3.11 U3.12 U3.13 U3.14 U3.15 U3.16 U3.17 U3.18 U3.19 U3.20
copper on no net:
  other v1: 9945,1592.68 9945,1635 9945,1677.32

## Text inside footprints (layer, text, board x,y; h text height)
X1: Bottom Overlay "17" at 3611.25,4057.19 h31.25; Bottom Overlay "14" at 3311.25,4059.53 h31.25; Bottom Overlay "15" at 3411.25,4059.53 h31.25; Bottom Overlay "11" at 3011.25,4059.53 h31.25; Bottom Overlay "12" at 3111.25,4057.19 h31.25; Bottom Overlay "8" at 2711.25,4059.53 h31.25; Bottom Overlay "9" at 2811.25,4055.62 h31.25; Bottom Overlay "5" at 2411.25,4060.31 h31.25; Bottom Overlay "6" at 2511.25,4061.88 h31.25; Bottom Overlay "2" at 2111.25,4060.31 h31.25; Bottom Overlay "3" at 2211.25,4059.53 h31.25; Bottom Overlay "10" at 2914.38,4060.31 h31.25; Bottom Overlay "13" at 3211.25,4057.97 h31.25; Bottom Overlay "16" at 3511.25,4059.53 h31.25; Bottom Overlay "4" at 2311.25,4059.53 h31.25; Bottom Overlay "7" at 2611.25,4056.41 h31.25; Bottom Overlay "1" at 2011.25,4060.31 h31.25; Bottom Overlay "A" at 3711.25,2399.38 h31.25; Bottom Overlay "D" at 3711.25,2699.38 h31.25; Bottom Overlay "C" at 3711.25,2599.38 h31.25; Bottom Overlay "G" at 3711.25,2999.38 h31.25; Bottom Overlay "F" at 3711.25,2899.38 h31.25; Bottom Overlay "K" at 3711.25,3283.75 h31.25; Bottom Overlay "J" at 3711.25,3183.75 h31.25; Bottom Overlay "N" at 3711.25,3583.75 h31.25; Bottom Overlay "M" at 3711.25,3483.75 h31.25; Bottom Overlay "R" at 3711.25,3783.75 h31.25; Bottom Overlay "L" at 3711.25,3383.75 h31.25; Bottom Overlay "H" at 3711.25,3099.38 h31.25; Bottom Overlay "E" at 3711.25,2799.38 h31.25; Bottom Overlay "B" at 3711.25,2499.38 h31.25; Bottom Overlay "P" at 3711.25,3683.75 h31.25; Bottom Overlay "P" at 1936.25,3683.75 h31.25; Bottom Overlay "B" at 1936.25,2499.38 h31.25; Bottom Overlay "E" at 1936.25,2799.38 h31.25; Bottom Overlay "H" at 1936.25,3099.38 h31.25; Bottom Overlay "L" at 1936.25,3383.75 h31.25; Bottom Overlay "1" at 2011.25,2335.31 h31.25; Bottom Overlay "7" at 2611.25,2331.41 h31.25; Bottom Overlay "4" at 2311.25,2334.53 h31.25; Bottom Overlay "16" at 3511.25,2334.53 h31.25; Bottom Overlay "13" at 3211.25,2332.97 h31.25; Bottom Overlay "10" at 2914.38,2335.31 h31.25; Bottom Overlay "R" at 1936.25,3783.75 h31.25; Bottom Overlay "M" at 1936.25,3483.75 h31.25; Bottom Overlay "N" at 1936.25,3583.75 h31.25; Bottom Overlay "J" at 1936.25,3183.75 h31.25; Bottom Overlay "K" at 1936.25,3283.75 h31.25; Bottom Overlay "F" at 1936.25,2899.38 h31.25; Bottom Overlay "G" at 1936.25,2999.38 h31.25; Bottom Overlay "C" at 1936.25,2599.38 h31.25; Bottom Overlay "D" at 1936.25,2699.38 h31.25; Bottom Overlay "A" at 1936.25,2399.38 h31.25; Bottom Overlay "3" at 2211.25,2334.53 h31.25; Bottom Overlay "2" at 2111.25,2335.31 h31.25; Bottom Overlay "6" at 2511.25,2336.88 h31.25; Bottom Overlay "5" at 2411.25,2335.31 h31.25; Bottom Overlay "9" at 2811.25,2330.62 h31.25; Bottom Overlay "8" at 2711.25,2334.53 h31.25; Bottom Overlay "12" at 3111.25,2332.19 h31.25; Bottom Overlay "11" at 3011.25,2334.53 h31.25; Bottom Overlay "15" at 3411.25,2334.53 h31.25; Bottom Overlay "14" at 3311.25,2334.53 h31.25; Bottom Overlay "17" at 3611.25,2332.19 h31.25; Bottom Overlay "T" at 3711.25,3883.75 h31.25; Bottom Overlay "U" at 3711.25,3983.75 h31.25; Bottom Overlay "U" at 1936.25,3983.75 h31.25; Bottom Overlay "T" at 1936.25,3883.75 h31.25; Top Overlay "17" at 3586.25,4057.19 h31.25; Top Overlay "14" at 3286.25,4059.53 h31.25; Top Overlay "13" at 3186.25,4057.97 h31.25; Top Overlay "9" at 2786.25,4055.62 h31.25; Top Overlay "10" at 2889.38,4060.31 h31.25; Top Overlay "5" at 2386.25,4060.31 h31.25; Top Overlay "16" at 3486.25,4059.53 h31.25; Top Overlay "15" at 3386.25,4059.53 h31.25; Top Overlay "12" at 3086.25,4057.19 h31.25; Top Overlay "11" at 2986.25,4059.53 h31.25; Top Overlay "8" at 2686.25,4059.53 h31.25; Top Overlay "7" at 2586.25,4056.41 h31.25; Top Overlay "6" at 2486.25,4061.88 h31.25; Top Overlay "4" at 2286.25,4059.53 h31.25; Top Overlay "3" at 2186.25,4059.53 h31.25; Top Overlay "2" at 2086.25,4060.31 h31.25; Top Overlay "1" at 1986.25,4060.31 h31.25; Top Overlay "B" at 1911.25,2499.38 h31.25; Top Overlay "C" at 1911.25,2599.38 h31.25; Top Overlay "F" at 1911.25,2899.38 h31.25; Top Overlay "G" at 1911.25,2999.38 h31.25; Top Overlay "L" at 1911.25,3383.75 h31.25; Top Overlay "M" at 1911.25,3483.75 h31.25; Top Overlay "R" at 1911.25,3783.75 h31.25; Top Overlay "T" at 1911.25,3883.75 h31.25; Top Overlay "A" at 1911.25,2399.38 h31.25; Top Overlay "E" at 1911.25,2799.38 h31.25; Top Overlay "D" at 1911.25,2699.38 h31.25; Top Overlay "H" at 1911.25,3099.38 h31.25; Top Overlay "J" at 1911.25,3183.75 h31.25; Top Overlay "K" at 1911.25,3283.75 h31.25; Top Overlay "P" at 1911.25,3683.75 h31.25; Top Overlay "N" at 1911.25,3583.75 h31.25; Top Overlay "U" at 1911.25,3983.75 h31.25; Top Overlay "1" at 1986.25,2335.31 h31.25; Top Overlay "2" at 2086.25,2335.31 h31.25; Top Overlay "3" at 2186.25,2334.53 h31.25; Top Overlay "4" at 2286.25,2334.53 h31.25; Top Overlay "6" at 2486.25,2336.88 h31.25; Top Overlay "7" at 2586.25,2331.41 h31.25; Top Overlay "8" at 2686.25,2334.53 h31.25; Top Overlay "11" at 2986.25,2334.53 h31.25; Top Overlay "12" at 3086.25,2332.19 h31.25; Top Overlay "15" at 3386.25,2334.53 h31.25; Top Overlay "16" at 3486.25,2334.53 h31.25; Top Overlay "5" at 2386.25,2335.31 h31.25; Top Overlay "10" at 2889.38,2335.31 h31.25; Top Overlay "9" at 2786.25,2330.62 h31.25; Top Overlay "13" at 3186.25,2332.97 h31.25; Top Overlay "14" at 3286.25,2334.53 h31.25; Top Overlay "17" at 3586.25,2332.19 h31.25; Top Overlay "U" at 3686.25,3983.75 h31.25; Top Overlay "N" at 3686.25,3583.75 h31.25; Top Overlay "P" at 3686.25,3683.75 h31.25; Top Overlay "K" at 3686.25,3283.75 h31.25; Top Overlay "J" at 3686.25,3183.75 h31.25; Top Overlay "H" at 3686.25,3099.38 h31.25; Top Overlay "D" at 3686.25,2699.38 h31.25; Top Overlay "E" at 3686.25,2799.38 h31.25; Top Overlay "A" at 3686.25,2399.38 h31.25; Top Overlay "T" at 3686.25,3883.75 h31.25; Top Overlay "R" at 3686.25,3783.75 h31.25; Top Overlay "M" at 3686.25,3483.75 h31.25; Top Overlay "L" at 3686.25,3383.75 h31.25; Top Overlay "G" at 3686.25,2999.38 h31.25; Top Overlay "F" at 3686.25,2899.38 h31.25; Top Overlay "C" at 3686.25,2599.38 h31.25; Top Overlay "B" at 3686.25,2499.38 h31.25